# Altium PCB PCB_CONTROL.PcbDoc (part 5 of 15)
Units mil, origin at the board's own origin, x right, y up, seen from the top; angles counter-clockwise.
Board outline 7360.03 x 4773.15 mil, 2 copper layers (Top Layer, Bottom Layer); 73 components, 135 nets, 396 pads, 106 vias.
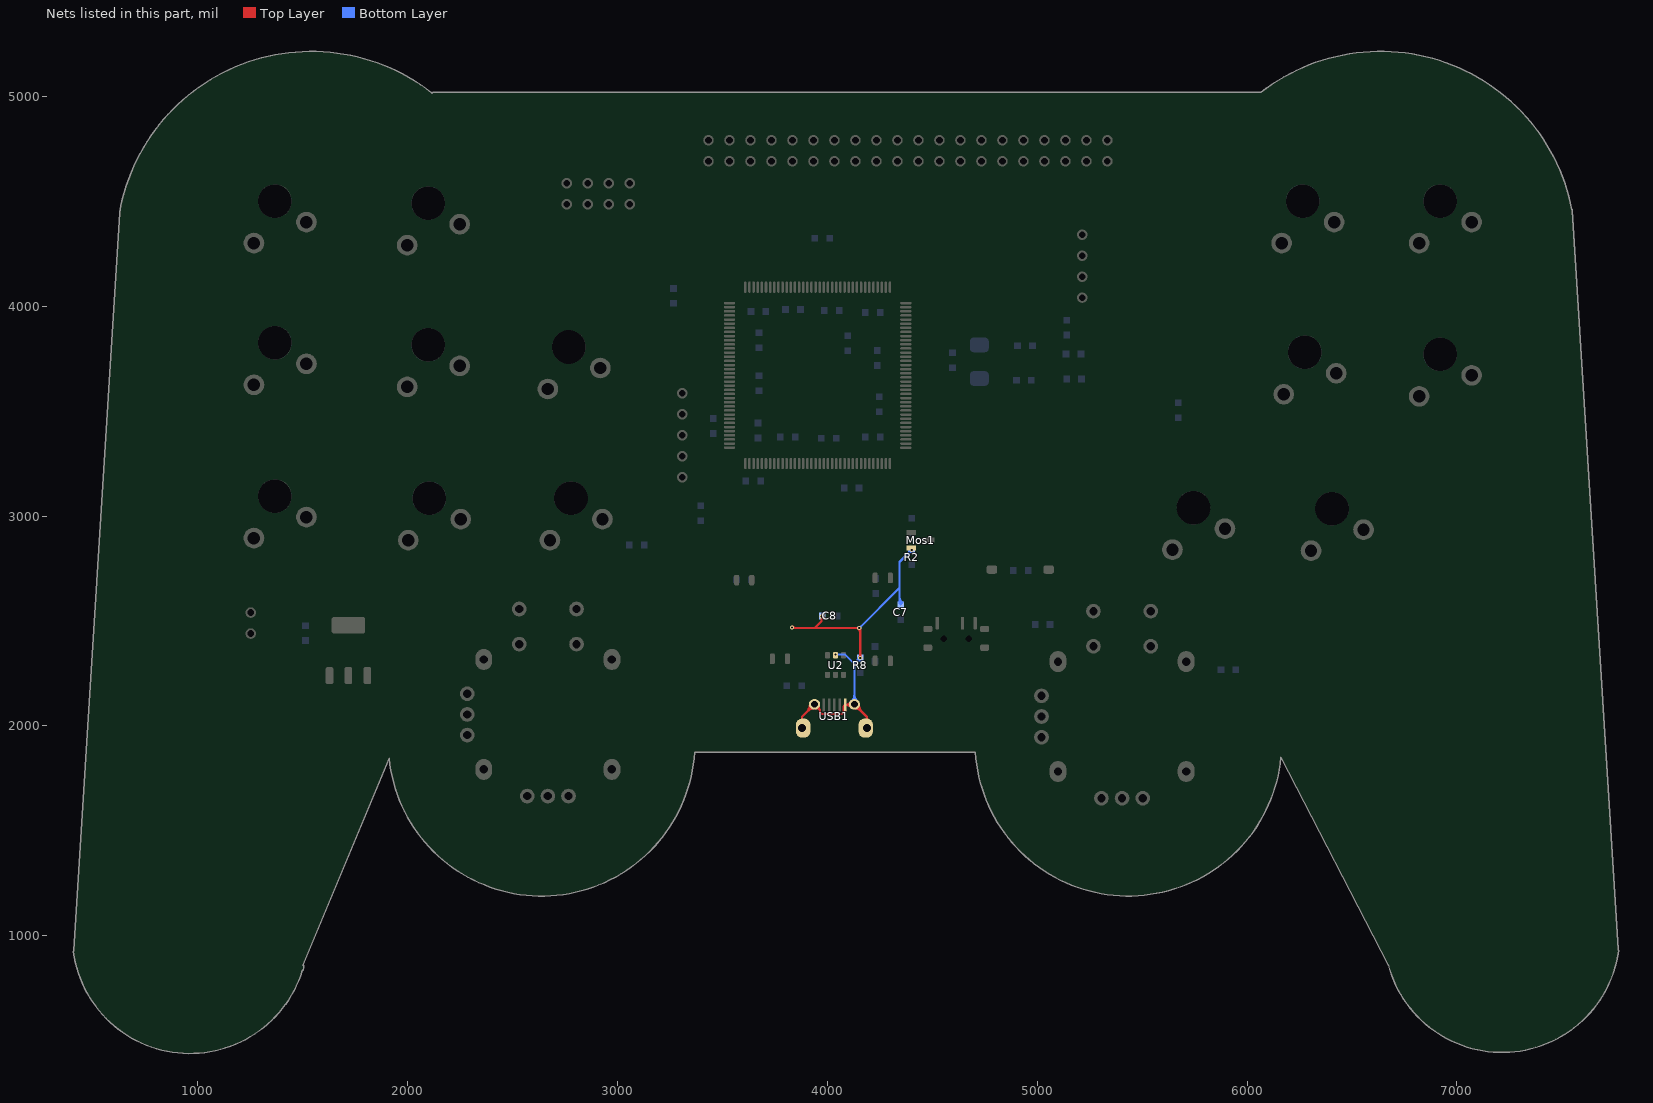
[diagram p5: the nets of this part, all layers, seen from the top]

## Via types
v1: diameter 20, hole 10, Top Layer to Bottom Layer, 104 vias
v2: diameter 30, hole 20, Top Layer to Bottom Layer, 2 vias

## Nets (pads, with @x,y where several pads share a name; then routed paths per layer and width w, separated by ;. In a path a pad name is that pad's centre, name@x,y a point inside that pad or via, vN(x,y) a via of type N, cw(c..) or ccw(c..) an arc to the next point about the centre after c; other vN are vias at no path point) (continued)
BGND: C7.2 C8.1 Mos1.S R2.2 R8.2 U2.2 USB1.0 USB1.5 | length 18672.9
  Top Layer w10: v1(3833,2469) 3836,2466 3940,2466 ; USB1.0@3880,1990 3880,2043 USB1.0@3940,2103 3966.82,2076.18 ; v1(4158,2324) v1@4158,2461 ; USB1.0@4190,1990 4190,2043 ; v1@3836.54,2472.54 ccw(c3852.31,2488.31) 3852.31,2466 ; v1@3836.54,2472.54 ccw(c3852.31,2488.31) 3852.31,2466 ; v1@3836.54,2472.54 ccw(c3852.31,2488.31) 3852.31,2466 ; v1@3836.54,2472.54 ccw(c3852.31,2488.31) 3852.31,2466 ; v1@3836.54,2472.54 ccw(c3852.31,2488.31) 3852.31,2466 ; v1@3836.54,2472.54 ccw(c3852.31,2488.31) 3852.31,2466 ; v1@3836.54,2472.54 ccw(c3852.31,2488.31) 3852.31,2466 ; v1@3836.54,2472.54 ccw(c3852.31,2488.31) 3852.31,2466 ; v1@3837.27,2466.4 cw(c3841.59,2463.77) 3844.12,2468.15 ; v1@3837.27,2466.4 cw(c3841.59,2463.77) 3844.12,2468.15 ; v1@3837.27,2466.4 cw(c3841.59,2463.77) 3844.12,2468.15 ; v1@3837.27,2466.4 cw(c3841.59,2463.77) 3844.12,2468.15 ; v1@3837.27,2466.4 cw(c3841.59,2463.77) 3844.12,2468.15 ; v1@3837.27,2466.4 cw(c3841.59,2463.77) 3844.12,2468.15 ; v1@3837.27,2466.4 cw(c3841.59,2463.77) 3844.12,2468.15 ; v1@3837.27,2466.4 cw(c3841.59,2463.77) 3844.12,2468.15 ; v1@3837.27,2466.4 cw(c3841.59,2463.77) 3844.12,2468.15 ; v1@3837.27,2466.4 cw(c3841.59,2463.77) 3844.12,2468.15 ; v1@3837.27,2466.4 cw(c3841.59,2463.77) 3844.12,2468.15 ; v1@3837.27,2466.4 cw(c3841.59,2463.77) 3844.12,2468.15 ; v1@3837.27,2466.4 cw(c3841.59,2463.77) 3844.12,2468.15 ; v1@3837.27,2466.4 cw(c3841.59,2463.77) 3844.12,2468.15 ; v1@3837.27,2466.4 cw(c3841.59,2463.77) 3844.12,2468.15 ; v1@3837.27,2466.4 cw(c3841.59,2463.77) 3844.12,2468.15 ; v1@3837.27,2466.4 cw(c3841.59,2463.77) 3844.12,2468.15 ; v1@3837.27,2466.4 cw(c3841.59,2463.77) 3844.12,2468.15 ; v1@3837.27,2466.4 cw(c3841.59,2463.77) 3844.12,2468.15 ; v1@3837.27,2466.4 cw(c3841.59,2463.77) 3844.12,2468.15 ; v1@3837.27,2466.4 cw(c3841.59,2463.77) 3844.12,2468.15 ; v1@3837.27,2466.4 cw(c3841.59,2463.77) 3844.12,2468.15 ; v1@3837.27,2466.4 cw(c3841.59,2463.77) 3844.12,2468.15 ; v1@3837.27,2466.4 cw(c3841.59,2463.77) 3844.12,2468.15 ; v1@3837.27,2466.4 cw(c3841.59,2463.77) 3844.12,2468.15 ; v1@3837.27,2466.4 cw(c3841.59,2463.77) 3844.12,2468.15 ; v1@3837.27,2466.4 cw(c3841.59,2463.77) 3844.12,2468.15 ; v1@3837.27,2466.4 cw(c3841.59,2463.77) 3844.12,2468.15 ; 3902.44,2065.44 ccw(c3864.89,2103) USB1.0@3918,2103 ; 3902.44,2065.44 ccw(c3864.89,2103) USB1.0@3918,2103 ; 3902.44,2065.44 ccw(c3864.89,2103) USB1.0@3918,2103 ; 3902.44,2065.44 ccw(c3864.89,2103) USB1.0@3918,2103 ; 3902.44,2065.44 ccw(c3864.89,2103) USB1.0@3918,2103 ; 3902.44,2065.44 ccw(c3864.89,2103) USB1.0@3918,2103 ; 3902.44,2065.44 ccw(c3864.89,2103) USB1.0@3918,2103 ; 3902.44,2065.44 ccw(c3864.89,2103) USB1.0@3918,2103 ; 3907.27,2070.27 cw(c3938,2039.54) USB1.0@3938,2083 ; 3907.27,2070.27 cw(c3938,2039.54) USB1.0@3938,2083 ; 3907.27,2070.27 cw(c3938,2039.54) USB1.0@3938,2083 ; 3907.27,2070.27 cw(c3938,2039.54) USB1.0@3938,2083 ; 3907.27,2070.27 cw(c3938,2039.54) USB1.0@3938,2083 ; 3907.27,2070.27 cw(c3938,2039.54) USB1.0@3938,2083 ; 3907.27,2070.27 cw(c3938,2039.54) USB1.0@3938,2083 ; 3907.27,2070.27 cw(c3938,2039.54) USB1.0@3938,2083 ; 3910.93,2076.62 cw(c3946.65,2067.04) USB1.0@3938,2103 ; 3910.93,2076.62 cw(c3946.65,2067.04) USB1.0@3938,2103 ; 3910.93,2076.62 cw(c3946.65,2067.04) USB1.0@3938,2103 ; 3910.93,2076.62 cw(c3946.65,2067.04) USB1.0@3938,2103 ; 3910.93,2076.62 cw(c3946.65,2067.04) USB1.0@3938,2103 ; 3910.93,2076.62 cw(c3946.65,2067.04) USB1.0@3938,2103 ; 3910.93,2076.62 cw(c3946.65,2067.04) USB1.0@3938,2103 ; 3910.93,2076.62 cw(c3946.65,2067.04) USB1.0@3938,2103 ; 3910.93,2076.62 cw(c3946.65,2067.04) USB1.0@3938,2103 ; 3910.93,2076.62 cw(c3946.65,2067.04) USB1.0@3938,2103 ; 3910.93,2076.62 cw(c3946.65,2067.04) USB1.0@3938,2103 ; 3910.93,2076.62 cw(c3946.65,2067.04) USB1.0@3938,2103 ; 3910.93,2076.62 cw(c3946.65,2067.04) USB1.0@3938,2103 ; 3910.93,2076.62 cw(c3946.65,2067.04) USB1.0@3938,2103 ; 3910.93,2076.62 cw(c3946.65,2067.04) USB1.0@3938,2103 ; 3910.93,2076.62 cw(c3946.65,2067.04) USB1.0@3938,2103 ; 3910.93,2076.62 cw(c3946.65,2067.04) USB1.0@3938,2103 ; 3910.93,2076.62 cw(c3946.65,2067.04) USB1.0@3938,2103 ; 3910.93,2076.62 cw(c3946.65,2067.04) USB1.0@3938,2103 ; 3910.93,2076.62 cw(c3946.65,2067.04) USB1.0@3938,2103 ; 3910.93,2076.62 cw(c3946.65,2067.04) USB1.0@3938,2103 ; 3910.93,2076.62 cw(c3946.65,2067.04) USB1.0@3938,2103 ; 3910.93,2076.62 cw(c3946.65,2067.04) USB1.0@3938,2103 ; 3910.93,2076.62 cw(c3946.65,2067.04) USB1.0@3938,2103 ; 3910.93,2076.62 cw(c3946.65,2067.04) USB1.0@3938,2103 ; 3910.93,2076.62 cw(c3946.65,2067.04) USB1.0@3938,2103 ; 3910.93,2076.62 cw(c3946.65,2067.04) USB1.0@3938,2103 ; 3910.93,2076.62 cw(c3946.65,2067.04) USB1.0@3938,2103 ; 3913.99,2076.57 ccw(c3905.45,2108.45) USB1.0@3938,2103 ; 3913.99,2076.57 ccw(c3905.45,2108.45) USB1.0@3938,2103 ; 3913.99,2076.57 ccw(c3905.45,2108.45) USB1.0@3938,2103 ; 3913.99,2076.57 ccw(c3905.45,2108.45) USB1.0@3938,2103 ; 3913.99,2076.57 ccw(c3905.45,2108.45) USB1.0@3938,2103 ; 3913.99,2076.57 ccw(c3905.45,2108.45) USB1.0@3938,2103 ; 3913.99,2076.57 ccw(c3905.45,2108.45) USB1.0@3938,2103 ; 3913.99,2076.57 ccw(c3905.45,2108.45) USB1.0@3938,2103 ; 3913.99,2076.57 ccw(c3905.45,2108.45) USB1.0@3938,2103 ; 3913.99,2076.57 ccw(c3905.45,2108.45) USB1.0@3938,2103 ; 3913.99,2076.57 ccw(c3905.45,2108.45) USB1.0@3938,2103 ; 3913.99,2076.57 ccw(c3905.45,2108.45) USB1.0@3938,2103 ; 3913.99,2076.57 ccw(c3905.45,2108.45) USB1.0@3938,2103 ; 3913.99,2076.57 ccw(c3905.45,2108.45) USB1.0@3938,2103 ; 3913.99,2076.57 ccw(c3905.45,2108.45) USB1.0@3938,2103 ; 3913.99,2076.57 ccw(c3905.45,2108.45) USB1.0@3938,2103 ; 3913.99,2076.57 ccw(c3905.45,2108.45) USB1.0@3938,2103 ; 3913.99,2076.57 ccw(c3905.45,2108.45) USB1.0@3938,2103 ; 3913.99,2076.57 ccw(c3905.45,2108.45) USB1.0@3938,2103 ; 3913.99,2076.57 ccw(c3905.45,2108.45) USB1.0@3938,2103 ; 3913.99,2076.57 ccw(c3905.45,2108.45) USB1.0@3938,2103 ; 3913.99,2076.57 ccw(c3905.45,2108.45) USB1.0@3938,2103 ; 3913.99,2076.57 ccw(c3905.45,2108.45) USB1.0@3938,2103 ; 3913.99,2076.57 ccw(c3905.45,2108.45) USB1.0@3938,2103 ; 3913.99,2076.57 ccw(c3905.45,2108.45) USB1.0@3938,2103 ; 3913.99,2076.57 ccw(c3905.45,2108.45) USB1.0@3938,2103 ; 3913.99,2076.57 ccw(c3905.45,2108.45) USB1.0@3938,2103 ; 3913.99,2076.57 ccw(c3905.45,2108.45) USB1.0@3938,2103 ; 3919.51,2082.51 ccw(c3899.03,2103) USB1.0@3928,2103 ; 3919.51,2082.51 ccw(c3899.03,2103) USB1.0@3928,2103 ; 3919.51,2082.51 ccw(c3899.03,2103) USB1.0@3928,2103 ; 3919.51,2082.51 ccw(c3899.03,2103) USB1.0@3928,2103 ; 3919.51,2082.51 ccw(c3899.03,2103) USB1.0@3928,2103 ; 3919.51,2082.51 ccw(c3899.03,2103) USB1.0@3928,2103 ; 3919.51,2082.51 ccw(c3899.03,2103) USB1.0@3928,2103 ; 3919.51,2082.51 ccw(c3899.03,2103) USB1.0@3928,2103 ; USB1.0@3934.22,2096.71 ccw(c3966.74,2123) 3962.34,2081.42 ; USB1.0@3934.22,2096.71 ccw(c3966.74,2123) 3962.34,2081.42 ; USB1.0@3934.22,2096.71 ccw(c3966.74,2123) 3962.34,2081.42 ; USB1.0@3934.22,2096.71 ccw(c3966.74,2123) 3962.34,2081.42 ; USB1.0@3934.22,2096.71 ccw(c3966.74,2123) 3962.34,2081.42 ; USB1.0@3934.22,2096.71 ccw(c3966.74,2123) 3962.34,2081.42 ; USB1.0@3934.22,2096.71 ccw(c3966.74,2123) 3962.34,2081.42 ; USB1.0@3934.22,2096.71 ccw(c3966.74,2123) 3962.34,2081.42 ; USB1.0@3934.22,2096.71 ccw(c3966.74,2123) 3962.34,2081.42 ; USB1.0@3934.22,2096.71 ccw(c3966.74,2123) 3962.34,2081.42 ; USB1.0@3934.22,2096.71 ccw(c3966.74,2123) 3962.34,2081.42 ; USB1.0@3934.22,2096.71 ccw(c3966.74,2123) 3962.34,2081.42 ; USB1.0@3934.22,2096.71 ccw(c3966.74,2123) 3962.34,2081.42 ; USB1.0@3934.22,2096.71 ccw(c3966.74,2123) 3962.34,2081.42 ; USB1.0@3934.22,2096.71 ccw(c3966.74,2123) 3962.34,2081.42 ; USB1.0@3934.22,2096.71 ccw(c3966.74,2123) 3962.34,2081.42 ; USB1.0@3934.22,2096.71 ccw(c3966.74,2123) 3962.34,2081.42 ; USB1.0@3934.22,2096.71 ccw(c3966.74,2123) 3962.34,2081.42 ; USB1.0@3934.22,2096.71 ccw(c3966.74,2123) 3962.34,2081.42 ; USB1.0@3934.22,2096.71 ccw(c3966.74,2123) 3962.34,2081.42 ; USB1.0@3934.22,2096.71 ccw(c3966.74,2123) 3962.34,2081.42 ; USB1.0@3934.22,2096.71 ccw(c3966.74,2123) 3962.34,2081.42 ; USB1.0@3934.22,2096.71 ccw(c3966.74,2123) 3962.34,2081.42 ; USB1.0@3934.22,2096.71 ccw(c3966.74,2123) 3962.34,2081.42 ; USB1.0@3934.22,2096.71 ccw(c3966.74,2123) 3962.34,2081.42 ; USB1.0@3934.22,2096.71 ccw(c3966.74,2123) 3962.34,2081.42 ; USB1.0@3934.22,2096.71 ccw(c3966.74,2123) 3962.34,2081.42 ; USB1.0@3934.22,2096.71 ccw(c3966.74,2123) 3962.34,2081.42 ; 3940,2466 3974,2500 ; 3940,2466 v1(4153,2466) ; USB1.0@3945.11,2083.24 cw(c3949.03,2058.39) 3966.82,2076.18 ; USB1.0@3945.11,2083.24 cw(c3949.03,2058.39) 3966.82,2076.18 ; USB1.0@3945.11,2083.24 cw(c3949.03,2058.39) 3966.82,2076.18 ; USB1.0@3945.11,2083.24 cw(c3949.03,2058.39) 3966.82,2076.18 ; USB1.0@3945.11,2083.24 cw(c3949.03,2058.39) 3966.82,2076.18 ; USB1.0@3945.11,2083.24 cw(c3949.03,2058.39) 3966.82,2076.18 ; USB1.0@3945.11,2083.24 cw(c3949.03,2058.39) 3966.82,2076.18 ; USB1.0@3945.11,2083.24 cw(c3949.03,2058.39) 3966.82,2076.18 ; USB1.0@3961.25,2097.56 ccw(c3982.26,2091.62) 3966.82,2076.18 ; USB1.0@3961.25,2097.56 ccw(c3982.26,2091.62) 3966.82,2076.18 ; USB1.0@3961.25,2097.56 ccw(c3982.26,2091.62) 3966.82,2076.18 ; USB1.0@3961.25,2097.56 ccw(c3982.26,2091.62) 3966.82,2076.18 ; USB1.0@3961.25,2097.56 ccw(c3982.26,2091.62) 3966.82,2076.18 ; USB1.0@3961.25,2097.56 ccw(c3982.26,2091.62) 3966.82,2076.18 ; USB1.0@3961.25,2097.56 ccw(c3982.26,2091.62) 3966.82,2076.18 ; USB1.0@3961.25,2097.56 ccw(c3982.26,2091.62) 3966.82,2076.18 ; 3966.82,2076.18 3966.82,2065.2 3975.02,2057 4069.39,2057 4077.59,2065.2 4077.59,2091.41 ; v1@3970.46,2518.46 cw(c3961.93,2509.93) 3974,2509.93 ; v1@3970.46,2518.46 cw(c3961.93,2509.93) 3974,2509.93 ; v1@3970.46,2518.46 cw(c3961.93,2509.93) 3974,2509.93 ; v1@3970.46,2518.46 cw(c3961.93,2509.93) 3974,2509.93 ; v1@3970.46,2518.46 cw(c3961.93,2509.93) 3974,2509.93 ; v1@3970.46,2518.46 cw(c3961.93,2509.93) 3974,2509.93 ; v1@3970.46,2518.46 cw(c3961.93,2509.93) 3974,2509.93 ; v1@3970.46,2518.46 cw(c3961.93,2509.93) 3974,2509.93 ; v1@3970.46,2518.46 cw(c3961.93,2509.93) 3974,2509.93 ; v1@3970.46,2518.46 cw(c3961.93,2509.93) 3974,2509.93 ; v1@3970.46,2518.46 cw(c3961.93,2509.93) 3974,2509.93 ; v1@3970.46,2518.46 cw(c3961.93,2509.93) 3974,2509.93 ; v1@3970.46,2518.46 cw(c3961.93,2509.93) 3974,2509.93 ; v1@3970.46,2518.46 cw(c3961.93,2509.93) 3974,2509.93 ; v1@3970.46,2518.46 cw(c3961.93,2509.93) 3974,2509.93 ; v1@3970.46,2518.46 cw(c3961.93,2509.93) 3974,2509.93 ; v1@3970.46,2518.46 cw(c3961.93,2509.93) 3974,2509.93 ; v1@3970.46,2518.46 cw(c3961.93,2509.93) 3974,2509.93 ; v1@3970.46,2518.46 cw(c3961.93,2509.93) 3974,2509.93 ; v1@3970.46,2518.46 cw(c3961.93,2509.93) 3974,2509.93 ; v1@3970.46,2518.46 cw(c3961.93,2509.93) 3974,2509.93 ; v1@3970.46,2518.46 cw(c3961.93,2509.93) 3974,2509.93 ; v1@3970.46,2518.46 cw(c3961.93,2509.93) 3974,2509.93 ; v1@3970.46,2518.46 cw(c3961.93,2509.93) 3974,2509.93 ; v1@3970.46,2518.46 cw(c3961.93,2509.93) 3974,2509.93 ; v1@3970.46,2518.46 cw(c3961.93,2509.93) 3974,2509.93 ; v1@3970.46,2518.46 cw(c3961.93,2509.93) 3974,2509.93 ; v1@3970.46,2518.46 cw(c3961.93,2509.93) 3974,2509.93 ; v1@3970.46,2518.46 cw(c3961.93,2509.93) 3974,2509.93 ; v1@3970.46,2518.46 cw(c3961.93,2509.93) 3974,2509.93 ; v1@3970.46,2518.46 cw(c3961.93,2509.93) 3974,2509.93 ; v1@3970.46,2518.46 cw(c3961.93,2509.93) 3974,2509.93 ; v1@3970.46,2518.46 cw(c3961.93,2509.93) 3974,2509.93 ; v1@3970.46,2518.46 cw(c3961.93,2509.93) 3974,2509.93 ; v1@3970.46,2518.46 cw(c3961.93,2509.93) 3974,2509.93 ; v1@3970.46,2518.46 cw(c3961.93,2509.93) 3974,2509.93 ; 3974,2500 v1(3974,2522) ; 3974,2500 v1(3974,2522) ; 3974,2500 v1(3974,2522) ; 3974,2500 v1(3974,2522) ; 3974,2509.93 cw(c3986.07,2509.93) v1@3977.54,2518.46 ; 3974,2509.93 cw(c3986.07,2509.93) v1@3977.54,2518.46 ; 3974,2509.93 cw(c3986.07,2509.93) v1@3977.54,2518.46 ; 3974,2509.93 cw(c3986.07,2509.93) v1@3977.54,2518.46 ; 3974,2509.93 cw(c3986.07,2509.93) v1@3977.54,2518.46 ; 3974,2509.93 cw(c3986.07,2509.93) v1@3977.54,2518.46 ; 3974,2509.93 cw(c3986.07,2509.93) v1@3977.54,2518.46 ; 3974,2509.93 cw(c3986.07,2509.93) v1@3977.54,2518.46 ; 3974,2509.93 cw(c3986.07,2509.93) v1@3977.54,2518.46 ; 3974,2509.93 cw(c3986.07,2509.93) v1@3977.54,2518.46 ; 3974,2509.93 cw(c3986.07,2509.93) v1@3977.54,2518.46 ; 3974,2509.93 cw(c3986.07,2509.93) v1@3977.54,2518.46 ; 3974,2509.93 cw(c3986.07,2509.93) v1@3977.54,2518.46 ; 3974,2509.93 cw(c3986.07,2509.93) v1@3977.54,2518.46 ; 3974,2509.93 cw(c3986.07,2509.93) v1@3977.54,2518.46 ; 3974,2509.93 cw(c3986.07,2509.93) v1@3977.54,2518.46 ; 3974,2509.93 cw(c3986.07,2509.93) v1@3977.54,2518.46 ; 3974,2509.93 cw(c3986.07,2509.93) v1@3977.54,2518.46 ; 3974,2509.93 cw(c3986.07,2509.93) v1@3977.54,2518.46 ; 3974,2509.93 cw(c3986.07,2509.93) v1@3977.54,2518.46 ; 3974,2509.93 cw(c3986.07,2509.93) v1@3977.54,2518.46 ; 3974,2509.93 cw(c3986.07,2509.93) v1@3977.54,2518.46 ; 3974,2509.93 cw(c3986.07,2509.93) v1@3977.54,2518.46 ; 3974,2509.93 cw(c3986.07,2509.93) v1@3977.54,2518.46 ; 3974,2509.93 cw(c3986.07,2509.93) v1@3977.54,2518.46 ; 3974,2509.93 cw(c3986.07,2509.93) v1@3977.54,2518.46 ; 3974,2509.93 cw(c3986.07,2509.93) v1@3977.54,2518.46 ; 3974,2509.93 cw(c3986.07,2509.93) v1@3977.54,2518.46 ; 3974,2509.93 cw(c3986.07,2509.93) v1@3977.54,2518.46 ; 3974,2509.93 cw(c3986.07,2509.93) v1@3977.54,2518.46 ; 3974,2509.93 cw(c3986.07,2509.93) v1@3977.54,2518.46 ; 3974,2509.93 cw(c3986.07,2509.93) v1@3977.54,2518.46 ; 3974,2509.93 cw(c3986.07,2509.93) v1@3977.54,2518.46 ; 3974,2509.93 cw(c3986.07,2509.93) v1@3977.54,2518.46 ; 3974,2509.93 cw(c3986.07,2509.93) v1@3977.54,2518.46 ; 3974,2509.93 cw(c3986.07,2509.93) v1@3977.54,2518.46 ; 4077.59,2061.7 cw(c4089.27,2061.7) USB1.5@4086.42,2073.03 ; 4077.59,2061.7 cw(c4089.27,2061.7) USB1.5@4086.42,2073.03 ; 4077.59,2061.7 cw(c4089.27,2061.7) USB1.5@4086.42,2073.03 ; 4077.59,2061.7 cw(c4089.27,2061.7) USB1.5@4086.42,2073.03 ; 4077.59,2061.7 cw(c4089.27,2061.7) USB1.5@4086.42,2073.03 ; 4077.59,2061.7 cw(c4089.27,2061.7) USB1.5@4086.42,2073.03 ; 4077.59,2061.7 cw(c4089.27,2061.7) USB1.5@4086.42,2073.03 ; 4077.59,2061.7 cw(c4089.27,2061.7) USB1.5@4086.42,2073.03 ; 4077.59,2074.52 cw(c4086.05,2074.52) USB1.5@4083.99,2082.73 ; 4077.59,2074.52 cw(c4086.05,2074.52) USB1.5@4083.99,2082.73 ; 4077.59,2074.52 cw(c4086.05,2074.52) USB1.5@4083.99,2082.73 ; 4077.59,2074.52 cw(c4086.05,2074.52) USB1.5@4083.99,2082.73 ; 4077.59,2074.52 cw(c4086.05,2074.52) USB1.5@4083.99,2082.73 ; 4077.59,2074.52 cw(c4086.05,2074.52) USB1.5@4083.99,2082.73 ; 4077.59,2074.52 cw(c4086.05,2074.52) USB1.5@4083.99,2082.73 ; 4077.59,2074.52 cw(c4086.05,2074.52) USB1.5@4083.99,2082.73 ; 4077.59,2087.35 cw(c4082.83,2087.35) USB1.5@4081.55,2092.43 ; 4077.59,2087.35 cw(c4082.83,2087.35) USB1.5@4081.55,2092.43 ; 4077.59,2087.35 cw(c4082.83,2087.35) USB1.5@4081.55,2092.43 ; 4077.59,2087.35 cw(c4082.83,2087.35) USB1.5@4081.55,2092.43 ; 4077.59,2087.35 cw(c4082.83,2087.35) USB1.5@4081.55,2092.43 ; 4077.59,2087.35 cw(c4082.83,2087.35) USB1.5@4081.55,2092.43 ; 4077.59,2087.35 cw(c4082.83,2087.35) USB1.5@4081.55,2092.43 ; 4077.59,2087.35 cw(c4082.83,2087.35) USB1.5@4081.55,2092.43 ; 4077.59,2087.85 cw(c4089.08,2087.85) USB1.5@4086.41,2099.03 ; 4077.59,2087.85 cw(c4089.08,2087.85) USB1.5@4086.41,2099.03 ; 4077.59,2087.85 cw(c4089.08,2087.85) USB1.5@4086.41,2099.03 ; 4077.59,2087.85 cw(c4089.08,2087.85) USB1.5@4086.41,2099.03 ; 4077.59,2087.85 cw(c4089.08,2087.85) USB1.5@4086.41,2099.03 ; 4077.59,2087.85 cw(c4089.08,2087.85) USB1.5@4086.41,2099.03 ; 4077.59,2087.85 cw(c4089.08,2087.85) USB1.5@4086.41,2099.03 ; 4077.59,2087.85 cw(c4089.08,2087.85) USB1.5@4086.41,2099.03 ; 4077.59,2087.85 cw(c4089.08,2087.85) USB1.5@4086.41,2099.03 ; 4077.59,2087.85 cw(c4089.08,2087.85) USB1.5@4086.41,2099.03 ; 4077.59,2091.41 USB1.5@4086.18,2100 ; 4077.59,2091.41 USB1.5@4086.18,2100 ; 4077.59,2091.41 USB1.5@4086.18,2100 ; 4077.59,2091.41 USB1.5@4086.18,2100 ; 4077.59,2091.41 USB1.5@4086.18,2100 ; 4077.59,2091.41 USB1.5@4086.18,2100 ; 4077.59,2091.41 USB1.5@4086.18,2100 ; USB1.5@4086.18,2100 ccw(c4086.18,2129.51) USB1.0@4111.11,2113.71 ; USB1.5@4086.18,2100 ccw(c4086.18,2129.51) USB1.0@4111.11,2113.71 ; USB1.5@4086.18,2100 ccw(c4086.18,2129.51) USB1.0@4111.11,2113.71 ; USB1.5@4086.18,2100 ccw(c4086.18,2129.51) USB1.0@4111.11,2113.71 ; USB1.5@4086.18,2100 ccw(c4086.18,2129.51) USB1.0@4111.11,2113.71 ; USB1.5@4086.18,2100 ccw(c4086.18,2129.51) USB1.0@4111.11,2113.71 ; USB1.5@4086.18,2100 ccw(c4086.18,2129.51) USB1.0@4111.11,2113.71 ; USB1.5@4086.18,2100 ccw(c4086.18,2129.51) USB1.0@4111.11,2113.71 ; USB1.5@4086.18,2100 4127,2100 USB1.0@4130,2103 4190,2043 ; USB1.5@4086.96,2100 cw(c4086.96,2061.96) USB1.0@4113.86,2088.86 ; USB1.5@4086.96,2100 cw(c4086.96,2061.96) USB1.0@4113.86,2088.86 ; USB1.5@4086.96,2100 cw(c4086.96,2061.96) USB1.0@4113.86,2088.86 ; USB1.5@4086.96,2100 cw(c4086.96,2061.96) USB1.0@4113.86,2088.86 ; USB1.5@4086.96,2100 cw(c4086.96,2061.96) USB1.0@4113.86,2088.86 ; USB1.5@4086.96,2100 cw(c4086.96,2061.96) USB1.0@4113.86,2088.86 ; USB1.5@4086.96,2100 cw(c4086.96,2061.96) USB1.0@4113.86,2088.86 ; USB1.5@4086.96,2100 cw(c4086.96,2061.96) USB1.0@4113.86,2088.86 ; 4113,2466 v1(4153,2466) ; 4113,2466 v1(4153,2466) ; 4113,2466 v1(4153,2466) ; USB1.0@4132,2083 cw(c4132,2039.54) 4162.73,2070.27 ; USB1.0@4132,2083 cw(c4132,2039.54) 4162.73,2070.27 ; USB1.0@4132,2083 cw(c4132,2039.54) 4162.73,2070.27 ; USB1.0@4132,2083 cw(c4132,2039.54) 4162.73,2070.27 ; USB1.0@4132,2083 cw(c4132,2039.54) 4162.73,2070.27 ; USB1.0@4132,2083 cw(c4132,2039.54) 4162.73,2070.27 ; USB1.0@4132,2083 cw(c4132,2039.54) 4162.73,2070.27 ; USB1.0@4132,2083 cw(c4132,2039.54) 4162.73,2070.27 ; USB1.0@4132,2103 ccw(c4164.55,2108.45) 4156.01,2076.57 ; USB1.0@4132,2103 cw(c4123.35,2067.04) 4159.07,2076.62 ; USB1.0@4132,2103 ccw(c4164.55,2108.45) 4156.01,2076.57 ; USB1.0@4132,2103 cw(c4123.35,2067.04) 4159.07,2076.62 ; USB1.0@4132,2103 ccw(c4164.55,2108.45) 4156.01,2076.57 ; USB1.0@4132,2103 cw(c4123.35,2067.04) 4159.07,2076.62 ; USB1.0@4132,2103 ccw(c4164.55,2108.45) 4156.01,2076.57 ; USB1.0@4132,2103 cw(c4123.35,2067.04) 4159.07,2076.62 ; USB1.0@4132,2103 ccw(c4164.55,2108.45) 4156.01,2076.57 ; USB1.0@4132,2103 cw(c4123.35,2067.04) 4159.07,2076.62 ; USB1.0@4132,2103 ccw(c4164.55,2108.45) 4156.01,2076.57 ; USB1.0@4132,2103 cw(c4123.35,2067.04) 4159.07,2076.62 ; USB1.0@4132,2103 ccw(c4164.55,2108.45) 4156.01,2076.57 ; USB1.0@4132,2103 cw(c4123.35,2067.04) 4159.07,2076.62 ; USB1.0@4132,2103 ccw(c4164.55,2108.45) 4156.01,2076.57 ; USB1.0@4132,2103 cw(c4123.35,2067.04) 4159.07,2076.62 ; USB1.0@4132,2103 ccw(c4164.55,2108.45) 4156.01,2076.57 ; USB1.0@4132,2103 cw(c4123.35,2067.04) 4159.07,2076.62 ; USB1.0@4132,2103 ccw(c4164.55,2108.45) 4156.01,2076.57 ; USB1.0@4132,2103 cw(c4123.35,2067.04) 4159.07,2076.62 ; USB1.0@4132,2103 ccw(c4164.55,2108.45) 4156.01,2076.57 ; USB1.0@4132,2103 cw(c4123.35,2067.04) 4159.07,2076.62 ; USB1.0@4132,2103 ccw(c4164.55,2108.45) 4156.01,2076.57 ; USB1.0@4132,2103 cw(c4123.35,2067.04) 4159.07,2076.62 ; USB1.0@4132,2103 ccw(c4164.55,2108.45) 4156.01,2076.57 ; USB1.0@4132,2103 cw(c4123.35,2067.04) 4159.07,2076.62 ; USB1.0@4132,2103 ccw(c4164.55,2108.45) 4156.01,2076.57 ; USB1.0@4132,2103 cw(c4123.35,2067.04) 4159.07,2076.62 ; USB1.0@4132,2103 ccw(c4164.55,2108.45) 4156.01,2076.57 ; USB1.0@4132,2103 cw(c4123.35,2067.04) 4159.07,2076.62 ; USB1.0@4132,2103 ccw(c4164.55,2108.45) 4156.01,2076.57 ; USB1.0@4132,2103 cw(c4123.35,2067.04) 4159.07,2076.62 ; USB1.0@4132,2103 ccw(c4164.55,2108.45) 4156.01,2076.57 ; USB1.0@4132,2103 cw(c4123.35,2067.04) 4159.07,2076.62 ; USB1.0@4132,2103 ccw(c4164.55,2108.45) 4156.01,2076.57 ; USB1.0@4132,2103 cw(c4123.35,2067.04) 4159.07,2076.62 ; USB1.0@4132,2103 ccw(c4164.55,2108.45) 4156.01,2076.57 ; USB1.0@4132,2103 cw(c4123.35,2067.04) 4159.07,2076.62 ; USB1.0@4132,2103 ccw(c4164.55,2108.45) 4156.01,2076.57 ; USB1.0@4132,2103 cw(c4123.35,2067.04) 4159.07,2076.62 ; USB1.0@4132,2103 ccw(c4164.55,2108.45) 4156.01,2076.57 ; USB1.0@4132,2103 cw(c4123.35,2067.04) 4159.07,2076.62 ; USB1.0@4132,2103 ccw(c4164.55,2108.45) 4156.01,2076.57 ; USB1.0@4132,2103 cw(c4123.35,2067.04) 4159.07,2076.62 ; USB1.0@4132,2103 ccw(c4164.55,2108.45) 4156.01,2076.57 ; USB1.0@4132,2103 cw(c4123.35,2067.04) 4159.07,2076.62 ; USB1.0@4132,2103 ccw(c4164.55,2108.45) 4156.01,2076.57 ; USB1.0@4132,2103 cw(c4123.35,2067.04) 4159.07,2076.62 ; USB1.0@4132,2103 ccw(c4164.55,2108.45) 4156.01,2076.57 ; USB1.0@4132,2103 cw(c4123.35,2067.04) 4159.07,2076.62 ; USB1.0@4132,2103 ccw(c4164.55,2108.45) 4156.01,2076.57 ; USB1.0@4132,2103 cw(c4123.35,2067.04) 4159.07,2076.62 ; USB1.0@4132,2103 ccw(c4164.55,2108.45) 4156.01,2076.57 ; USB1.0@4132,2103 cw(c4123.35,2067.04) 4159.07,2076.62 ; USB1.0@4132,2103 ccw(c4164.55,2108.45) 4156.01,2076.57 ; USB1.0@4132,2103 cw(c4123.35,2067.04) 4159.07,2076.62 ; 4140.93,2466 cw(c4140.93,2453.93) v1@4149.46,2462.46 ; 4140.93,2466 ccw(c4140.93,2478.07) v1@4149.46,2469.54 ; 4140.93,2466 cw(c4140.93,2453.93) v1@4149.46,2462.46 ; 4140.93,2466 ccw(c4140.93,2478.07) v1@4149.46,2469.54 ; 4140.93,2466 cw(c4140.93,2453.93) v1@4149.46,2462.46 ; 4140.93,2466 ccw(c4140.93,2478.07) v1@4149.46,2469.54 ; 4140.93,2466 cw(c4140.93,2453.93) v1@4149.46,2462.46 ; 4140.93,2466 ccw(c4140.93,2478.07) v1@4149.46,2469.54 ; 4140.93,2466 ccw(c4140.93,2478.07) v1@4149.46,2469.54 ; 4140.93,2466 cw(c4140.93,2453.93) v1@4149.46,2462.46 ; 4140.93,2466 ccw(c4140.93,2478.07) v1@4149.46,2469.54 ; 4140.93,2466 cw(c4140.93,2453.93) v1@4149.46,2462.46 ; 4140.93,2466 ccw(c4140.93,2478.07) v1@4149.46,2469.54 ; 4140.93,2466 cw(c4140.93,2453.93) v1@4149.46,2462.46 ; 4140.93,2466 ccw(c4140.93,2478.07) v1@4149.46,2469.54 ; 4140.93,2466 cw(c4140.93,2453.93) v1@4149.46,2462.46 ; 4140.93,2466 ccw(c4140.93,2478.07) v1@4149.46,2469.54 ; 4140.93,2466 cw(c4140.93,2453.93) v1@4149.46,2462.46 ; 4140.93,2466 ccw(c4140.93,2478.07) v1@4149.46,2469.54 ; 4140.93,2466 cw(c4140.93,2453.93) v1@4149.46,2462.46 ; 4140.93,2466 ccw(c4140.93,2478.07) v1@4149.46,2469.54 ; 4140.93,2466 cw(c4140.93,2453.93) v1@4149.46,2462.46 ; 4140.93,2466 ccw(c4140.93,2478.07) v1@4149.46,2469.54 ; 4140.93,2466 cw(c4140.93,2453.93) v1@4149.46,2462.46 ; 4140.93,2466 ccw(c4140.93,2478.07) v1@4149.46,2469.54 ; 4140.93,2466 cw(c4140.93,2453.93) v1@4149.46,2462.46 ; 4140.93,2466 ccw(c4140.93,2478.07) v1@4149.46,2469.54 ; 4140.93,2466 cw(c4140.93,2453.93) v1@4149.46,2462.46 ; 4140.93,2466 ccw(c4140.93,2478.07) v1@4149.46,2469.54 ; 4140.93,2466 cw(c4140.93,2453.93) v1@4149.46,2462.46 ; 4140.93,2466 ccw(c4140.93,2478.07) v1@4149.46,2469.54 ; 4140.93,2466 cw(c4140.93,2453.93) v1@4149.46,2462.46 ; 4140.93,2466 ccw(c4140.93,2478.07) v1@4149.46,2469.54 ; 4140.93,2466 cw(c4140.93,2453.93) v1@4149.46,2462.46 ; 4140.93,2466 ccw(c4140.93,2478.07) v1@4149.46,2469.54 ; 4140.93,2466 cw(c4140.93,2453.93) v1@4149.46,2462.46 ; 4140.93,2466 ccw(c4140.93,2478.07) v1@4149.46,2469.54 ; 4140.93,2466 cw(c4140.93,2453.93) v1@4149.46,2462.46 ; 4140.93,2466 ccw(c4140.93,2478.07) v1@4149.46,2469.54 ; 4140.93,2466 cw(c4140.93,2453.93) v1@4149.46,2462.46 ; 4140.93,2466 ccw(c4140.93,2478.07) v1@4149.46,2469.54 ; 4140.93,2466 cw(c4140.93,2453.93) v1@4149.46,2462.46 ; 4140.93,2466 ccw(c4140.93,2478.07) v1@4149.46,2469.54 ; 4140.93,2466 cw(c4140.93,2453.93) v1@4149.46,2462.46 ; 4140.93,2466 ccw(c4140.93,2478.07) v1@4149.46,2469.54 ; 4140.93,2466 cw(c4140.93,2453.93) v1@4149.46,2462.46 ; 4140.93,2466 ccw(c4140.93,2478.07) v1@4149.46,2469.54 ; 4140.93,2466 cw(c4140.93,2453.93) v1@4149.46,2462.46 ; 4140.93,2466 ccw(c4140.93,2478.07) v1@4149.46,2469.54 ; 4140.93,2466 cw(c4140.93,2453.93) v1@4149.46,2462.46 ; 4140.93,2466 ccw(c4140.93,2478.07) v1@4149.46,2469.54 ; 4140.93,2466 cw(c4140.93,2453.93) v1@4149.46,2462.46 ; 4140.93,2466 ccw(c4140.93,2478.07) v1@4149.46,2469.54 ; 4140.93,2466 cw(c4140.93,2453.93) v1@4149.46,2462.46 ; 4140.93,2466 ccw(c4140.93,2478.07) v1@4149.46,2469.54 ; 4140.93,2466 cw(c4140.93,2453.93) v1@4149.46,2462.46 ; 4140.93,2466 ccw(c4140.93,2478.07) v1@4149.46,2469.54 ; 4140.93,2466 cw(c4140.93,2453.93) v1@4149.46,2462.46 ; 4140.93,2466 ccw(c4140.93,2478.07) v1@4149.46,2469.54 ; 4140.93,2466 cw(c4140.93,2453.93) v1@4149.46,2462.46 ; 4140.93,2466 ccw(c4140.93,2478.07) v1@4149.46,2469.54 ; 4140.93,2466 cw(c4140.93,2453.93) v1@4149.46,2462.46 ; 4140.93,2466 ccw(c4140.93,2478.07) v1@4149.46,2469.54 ; 4140.93,2466 cw(c4140.93,2453.93) v1@4149.46,2462.46 ; 4140.93,2466 ccw(c4140.93,2478.07) v1@4149.46,2469.54 ; 4140.93,2466 cw(c4140.93,2453.93) v1@4149.46,2462.46 ; 4140.93,2466 ccw(c4140.93,2478.07) v1@4149.46,2469.54 ; 4140.93,2466 cw(c4140.93,2453.93) v1@4149.46,2462.46 ; 4140.93,2466 ccw(c4140.93,2478.07) v1@4149.46,2469.54 ; 4140.93,2466 cw(c4140.93,2453.93) v1@4149.46,2462.46 ; 4140.93,2466 ccw(c4140.93,2478.07) v1@4149.46,2469.54 ; 4140.93,2466 cw(c4140.93,2453.93) v1@4149.46,2462.46 ; USB1.0@4142,2103 ccw(c4170.97,2103) 4150.49,2082.51 ; USB1.0@4142,2103 ccw(c4170.97,2103) 4150.49,2082.51 ; USB1.0@4142,2103 ccw(c4170.97,2103) 4150.49,2082.51 ; USB1.0@4142,2103 ccw(c4170.97,2103) 4150.49,2082.51 ; USB1.0@4142,2103 ccw(c4170.97,2103) 4150.49,2082.51 ; USB1.0@4142,2103 ccw(c4170.97,2103) 4150.49,2082.51 ; USB1.0@4142,2103 ccw(c4170.97,2103) 4150.49,2082.51 ; USB1.0@4142,2103 ccw(c4170.97,2103) 4150.49,2082.51 ; v1@4149.46,2462.46 cw(c4128.86,2441.86) 4158,2441.86 ; v1@4149.46,2462.46 cw(c4128.86,2441.86) 4158,2441.86 ; v1@4149.46,2462.46 cw(c4128.86,2441.86) 4158,2441.86 ; v1@4149.46,2462.46 cw(c4128.86,2441.86) 4158,2441.86 ; v1@4149.46,2462.46 cw(c4128.86,2441.86) 4158,2441.86 ; v1@4149.46,2462.46 cw(c4128.86,2441.86) 4158,2441.86 ; v1@4149.46,2462.46 cw(c4128.86,2441.86) 4158,2441.86 ; v1@4149.46,2462.46 cw(c4128.86,2441.86) 4158,2441.86 ; USB1.0@4152,2103 ccw(c4205.11,2103) 4167.56,2065.44 ; USB1.0@4152,2103 ccw(c4205.11,2103) 4167.56,2065.44 ; USB1.0@4152,2103 ccw(c4205.11,2103) 4167.56,2065.44 ; USB1.0@4152,2103 ccw(c4205.11,2103) 4167.56,2065.44 ; USB1.0@4152,2103 ccw(c4205.11,2103) 4167.56,2065.44 ; USB1.0@4152,2103 ccw(c4205.11,2103) 4167.56,2065.44 ; USB1.0@4152,2103 ccw(c4205.11,2103) 4167.56,2065.44 ; USB1.0@4152,2103 ccw(c4205.11,2103) 4167.56,2065.44 ; v1@4154.46,2327.54 ccw(c4145.93,2336.07) 4158,2336.07 ; v1@4154.46,2327.54 ccw(c4145.93,2336.07) 4158,2336.07 ; v1@4154.46,2327.54 ccw(c4145.93,2336.07) 4158,2336.07 ; v1@4154.46,2327.54 ccw(c4145.93,2336.07) 4158,2336.07 ; v1@4154.46,2327.54 ccw(c4145.93,2336.07) 4158,2336.07 ; v1@4154.46,2327.54 ccw(c4145.93,2336.07) 4158,2336.07 ; v1@4154.46,2327.54 ccw(c4145.93,2336.07) 4158,2336.07 ; v1@4154.46,2327.54 ccw(c4145.93,2336.07) 4158,2336.07 ; v1@4154.46,2327.54 ccw(c4145.93,2336.07) 4158,2336.07 ; v1@4154.46,2327.54 ccw(c4145.93,2336.07) 4158,2336.07 ; 4155.61,2451.82 cw(c4163.68,2456.47) v1@4156.73,2462.67 ; 4155.61,2451.82 cw(c4163.68,2456.47) v1@4156.73,2462.67 ; 4155.61,2451.82 cw(c4163.68,2456.47) v1@4156.73,2462.67 ; 4155.61,2451.82 cw(c4163.68,2456.47) v1@4156.73,2462.67 ; 4155.61,2451.82 cw(c4163.68,2456.47) v1@4156.73,2462.67 ; 4155.61,2451.82 cw(c4163.68,2456.47) v1@4156.73,2462.67 ; 4155.61,2451.82 cw(c4163.68,2456.47) v1@4156.73,2462.67 ; 4155.61,2451.82 cw(c4163.68,2456.47) v1@4156.73,2462.67 ; 4155.61,2451.82 cw(c4163.68,2456.47) v1@4156.73,2462.67 ; 4155.61,2451.82 cw(c4163.68,2456.47) v1@4156.73,2462.67 ; 4155.61,2451.82 cw(c4163.68,2456.47) v1@4156.73,2462.67 ; 4155.61,2451.82 cw(c4163.68,2456.47) v1@4156.73,2462.67 ; 4155.61,2451.82 cw(c4163.68,2456.47) v1@4156.73,2462.67 ; 4155.61,2451.82 cw(c4163.68,2456.47) v1@4156.73,2462.67 ; 4155.61,2451.82 cw(c4163.68,2456.47) v1@4156.73,2462.67 ; 4155.61,2451.82 cw(c4163.68,2456.47) v1@4156.73,2462.67 ; 4155.61,2451.82 cw(c4163.68,2456.47) v1@4156.73,2462.67 ; 4155.61,2451.82 cw(c4163.68,2456.47) v1@4156.73,2462.67 ; 4155.61,2451.82 cw(c4163.68,2456.47) v1@4156.73,2462.67 ; 4155.61,2451.82 cw(c4163.68,2456.47) v1@4156.73,2462.67 ; 4155.61,2451.82 cw(c4163.68,2456.47) v1@4156.73,2462.67 ; 4155.61,2451.82 cw(c4163.68,2456.47) v1@4156.73,2462.67 ; 4155.61,2451.82 cw(c4163.68,2456.47) v1@4156.73,2462.67 ; 4155.61,2451.82 cw(c4163.68,2456.47) v1@4156.73,2462.67 ; 4155.61,2451.82 cw(c4163.68,2456.47) v1@4156.73,2462.67 ; 4155.61,2451.82 cw(c4163.68,2456.47) v1@4156.73,2462.67 ; 4155.61,2451.82 cw(c4163.68,2456.47) v1@4156.73,2462.67 ; 4155.61,2451.82 cw(c4163.68,2456.47) v1@4156.73,2462.67 ; 4158,2336.07 ccw(c4170.07,2336.07) v1@4161.54,2327.54 ; 4158,2336.07 ccw(c4170.07,2336.07) v1@4161.54,2327.54 ; 4158,2336.07 ccw(c4170.07,2336.07) v1@4161.54,2327.54 ; 4158,2336.07 ccw(c4170.07,2336.07) v1@4161.54,2327.54 ; 4158,2336.07 ccw(c4170.07,2336.07) v1@4161.54,2327.54 ; 4158,2336.07 ccw(c4170.07,2336.07) v1@4161.54,2327.54 ; 4158,2336.07 ccw(c4170.07,2336.07) v1@4161.54,2327.54 ; 4158,2336.07 ccw(c4170.07,2336.07) v1@4161.54,2327.54 ; 4158,2336.07 ccw(c4170.07,2336.07) v1@4161.54,2327.54 ; 4158,2336.07 ccw(c4170.07,2336.07) v1@4161.54,2327.54 ; USB1.0@4176.51,2020.67 ccw(c4164.78,2043) 4190,2043 ; USB1.0@4176.51,2020.67 ccw(c4164.78,2043) 4190,2043 ; USB1.0@4176.51,2020.67 ccw(c4164.78,2043) 4190,2043 ; USB1.0@4176.51,2020.67 ccw(c4164.78,2043) 4190,2043 ; USB1.0@4176.51,2020.67 ccw(c4164.78,2043) 4190,2043 ; USB1.0@4176.51,2020.67 ccw(c4164.78,2043) 4190,2043 ; USB1.0@4176.51,2020.67 ccw(c4164.78,2043) 4190,2043 ; USB1.0@4176.51,2020.67 ccw(c4164.78,2043) 4190,2043 ; 4190,2043 ccw(c4215.22,2043) USB1.0@4203.49,2020.67 ; 4190,2043 ccw(c4215.22,2043) USB1.0@4203.49,2020.67 ; 4190,2043 ccw(c4215.22,2043) USB1.0@4203.49,2020.67 ; 4190,2043 ccw(c4215.22,2043) USB1.0@4203.49,2020.67 ; 4190,2043 ccw(c4215.22,2043) USB1.0@4203.49,2020.67 ; 4190,2043 ccw(c4215.22,2043) USB1.0@4203.49,2020.67 ; 4190,2043 ccw(c4215.22,2043) USB1.0@4203.49,2020.67 ; 4190,2043 ccw(c4215.22,2043) USB1.0@4203.49,2020.67